# Altium PCB 发送端V02.PcbDoc
Units mm, origin at the board's own origin, x right, y up, seen from the top; angles counter-clockwise.
Board outline 99.5 x 63.5 mm, 2 copper layers (Top Layer, Bottom Layer); 58 components, 29 nets, 249 pads, 0 vias.
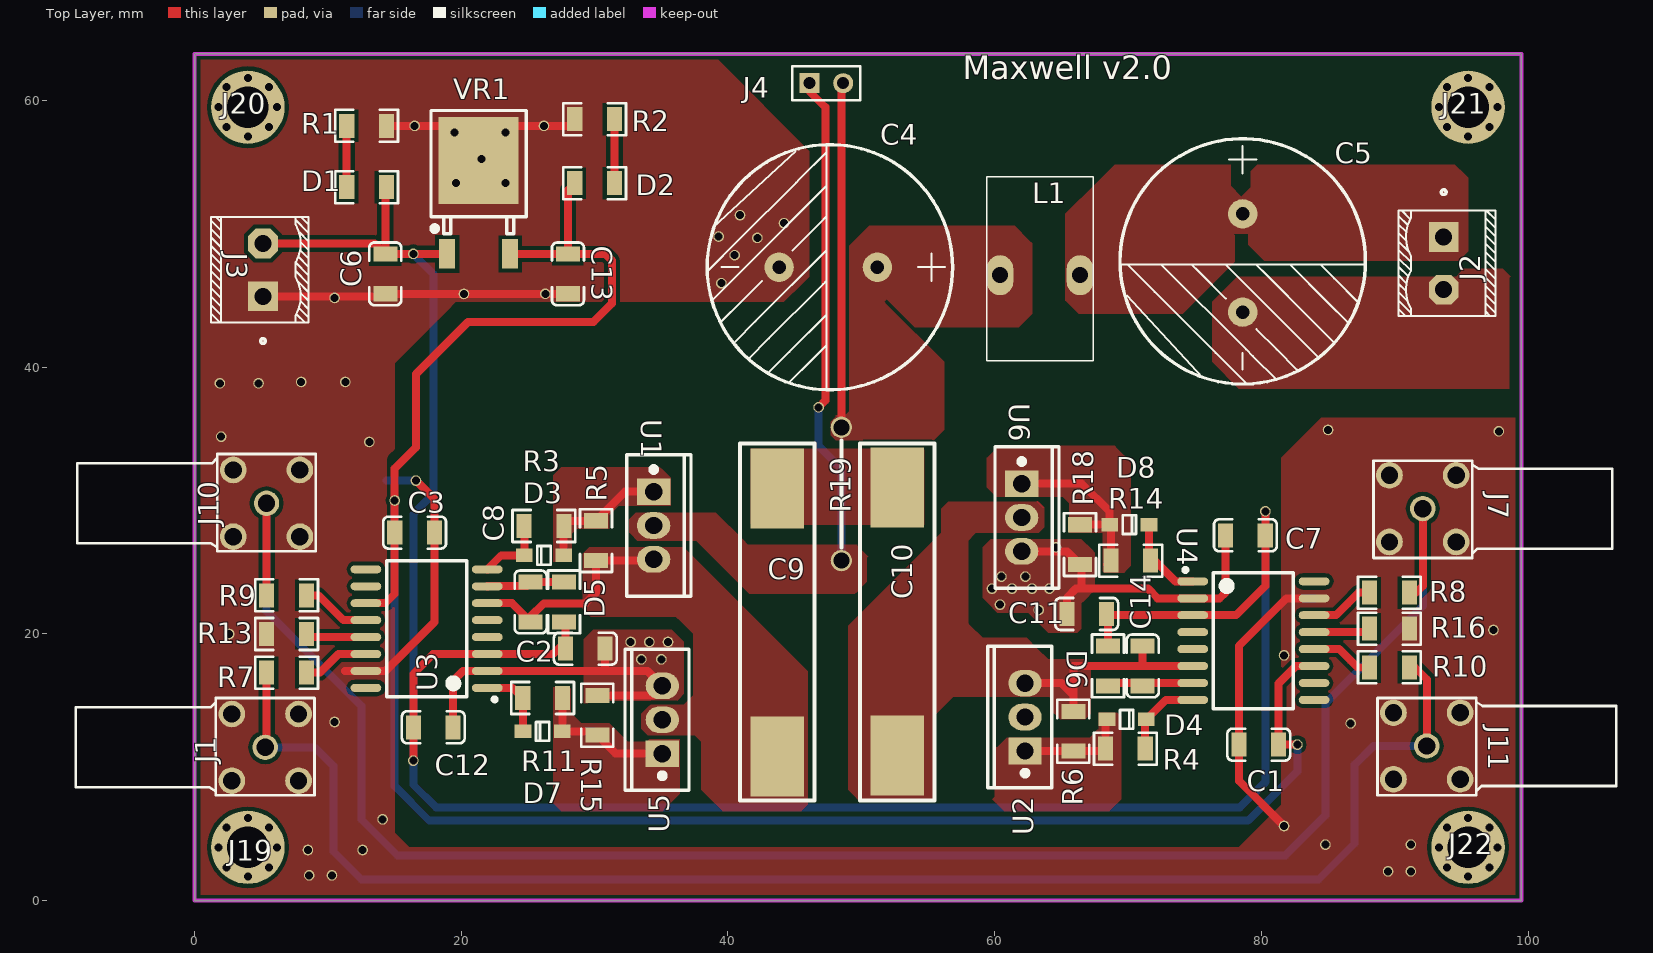
[diagram p0: Top Layer view]
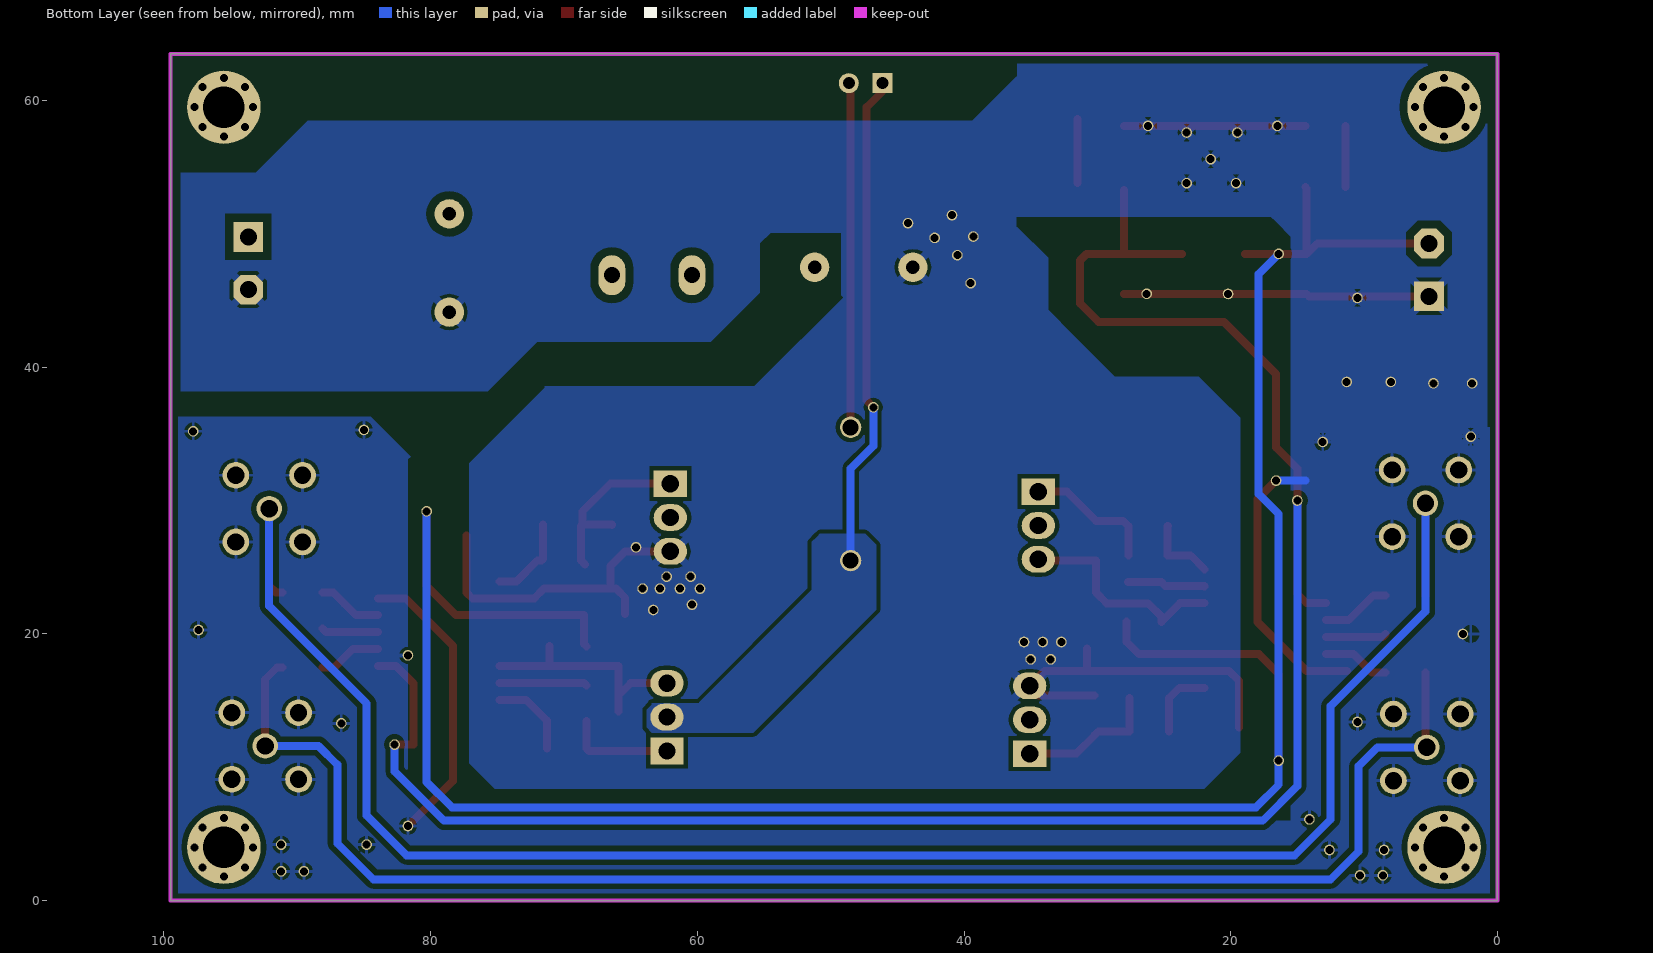
[diagram p1: Bottom Layer view, seen from below]
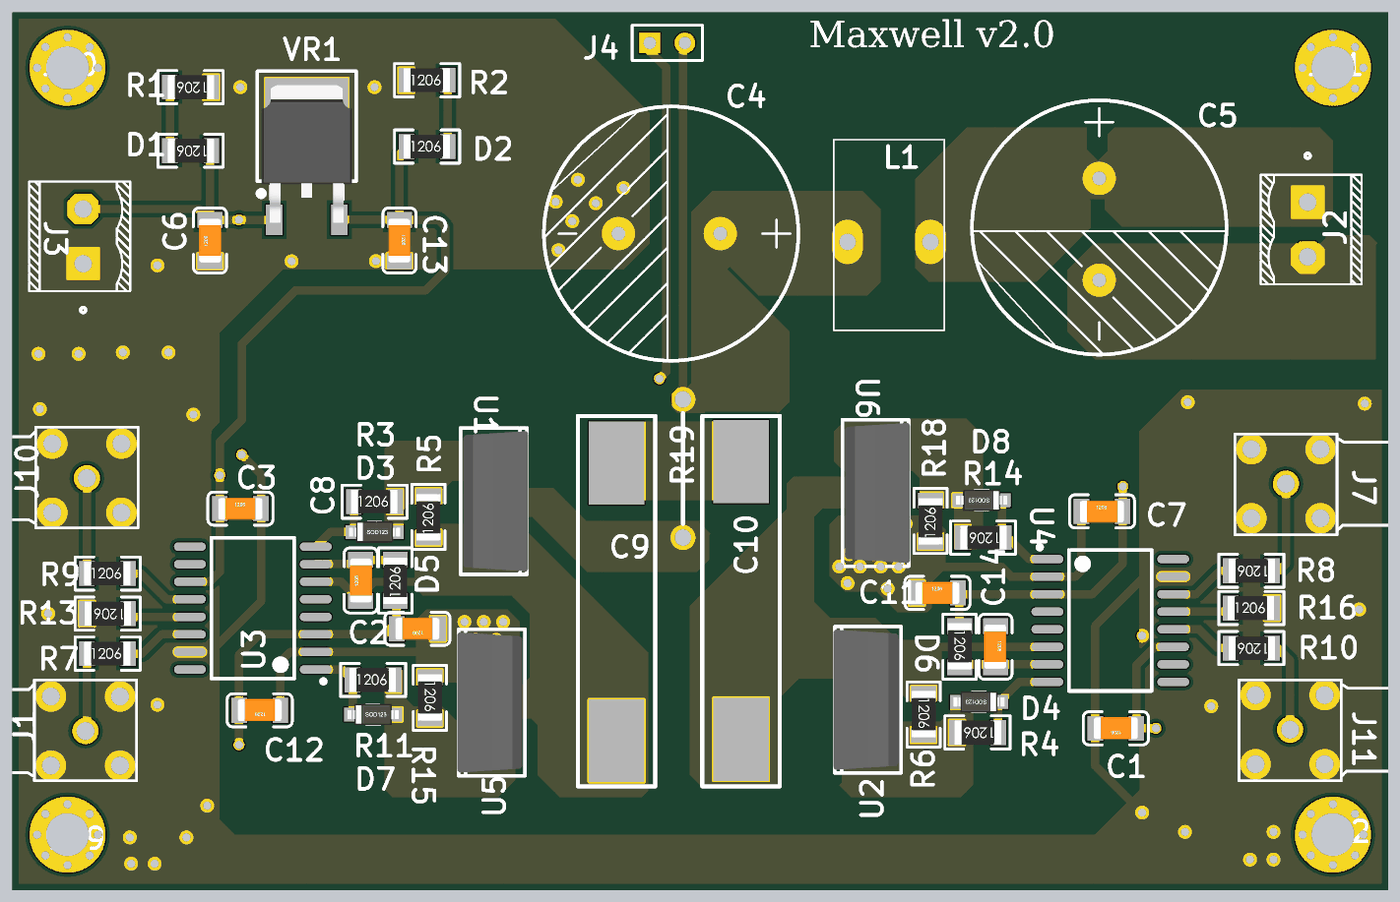
[diagram p2: 3D render of the assembled board from above, using the file's embedded part models]

## Layer stack, top to bottom
Top Solder: solder mask 0.0102, Solder Resist, Dk 3.5
Top Layer: signal copper 0.0356
Dielectric1: dielectric 0.32, FR-4, Dk 4.8
Bottom Layer: signal copper 0.0356
Bottom Solder: solder mask 0.0102, Solder Resist, Dk 3.5

## Board outline
0,0 0,63.5 99.5,63.5 99.5,0

## Design rules (kind name [scope] priority, off if disabled: settings)
Clearance [All] p1: gap=0.3
ComponentClearance [All] p1: gap=0 collisioncheckmode=3 verticalgap=0 showdistances=FALSE
HoleSize [All] p1 off: absolutevalues=TRUE maxlimit=2.54 minlimit=0.3 maxpercent=80.000 minpercent=20.000
HoleToHoleClearance [All] p1 off: gap=0.254 allowstackedmicrovias=TRUE
LayerPairs [All] p1 off: enforce=TRUE
MinimumSolderMaskSliver [All] p1 off: minsoldermaskwidth=0.254
NetAntennae [All] p1 off: netantennaetolerance=0
PolygonConnect [All] p1: connectstyle=Direct reliefconductorwidth=0.6 reliefentries=4 polygonreliefangle="45 Angle" airgapwidth=0.254
RoutingVias [All] p1: holewidth=0.4 width=0.6 viastyle="Through Hole" minholewidth=0.3 minwidth=0.5 maxholewidth=20 maxwidth=30
SilkToSilkClearance [All] p1 off: silktosilkclearance=0.254
SilkToSolderMaskClearance SilkscreenOverComponentPads [IsPad] p1 off: minsilkscreentomaskgap=0.254 clearancetoexposedcopper=TRUE
SolderMaskExpansion [All] p1: expansion=0.102
Width [All] p1: maxlimit=20 minlimit=0.6 preferedwidth=1
22 further rules are at their usual default settings.

## Components (designator, comment, footprint, x,y, rotation, side; value= is the part's Value field where it differs from the comment)
C1 "10UF" 1206_C 79.8,11.7 r180 top
C2 "10UF" 1206_C 29.3,18.9 r180 top
C3 "10UF" 1206_C 16.5,27.6 r0 top
C4 "47uF/160V" C3618 51.2,47.5 r180 top
C5 "47uF/160V" C3618 78.6,51.5 r270 top
C6 "10UF" 1206_C 14.3,47 r90 top
C7 "10UF" 1206_C 78.8,27.4 r0 top
C8 "2.2nF" 1206_C 25.2,22.4 r90 top
C9 "0.1uF/160V" DSMC82 43.6,9.7 r90 top
C10 "0.1uF/160V" DSMC82 52.8,32.1 r270 top
C11 "2.2nF" 1206_C 66.9,21.5 r0 top
C12 "2.2nF" 1206_C 17.9,13 r180 top
C13 "10UF" 1206_C 28,47 r270 top
C14 "2.2nF" 1206_C 71.1,17.6 r270 top
D1 "LED3" 1206_R 12.9,53.5 r180 top
D2 "LED3" 1206_R 30,53.8 r0 top
D3 "1N4148WS" SOD-123 26.2,25.9 r0 top
D4 "1N4148WS" SOD-123 69.9,13.6 r180 top
D5 "B2100" 1206_R 27.7,22.4 r90 top
D6 "1N4148WS" 1206_R 68.5,17.6 r270 top
D7 "1N4148WS" SOD-123 26.1,12.7 r0 top
D8 "1N4148WS" SOD-123 70.1,28.2 r180 top
J1 "CON-2" GPSPIN 7.8,9 r180 top
J2 "CON-2" F396P2-1 93.9,48 r90 top
J3 "CON-2" F396P2-1 4.9,47.1 r270 top
J4 "CON-2" HDR1X2 46.1,61.3 r0 top
J7 "CON-2" GPSPIN 89.6,31.9 r0 top
J10 "CON-2" GPSPIN 7.9,27.3 r180 top
J11 "CON-2" GPSPIN 89.9,14.1 r0 top
J19 "Socket" M3 4,4 r0 top
J20 "Socket" M3 4,59.5 r0 top
J21 "Socket" M3 95.5,59.5 r0 top
J22 "Socket" M3 95.5,4 r0 top
L1 "330mH" H3.3 66.4,46.9 r180 top
R1 "5K" 1206_R 12.9,58.1 r180 top
R2 "1K" 1206_R 30,58.6 r0 top
R3 "22R" 1206_R 26.2,28.1 r0 top
R4 "22R" 1206_R 69.8,11.4 r180 top
R5 "10K" 1206_R 30.1,27 r90 top
R6 "10K" 1206_R 65.9,12.7 r270 top
R7 "100R" 1206_R 6.9,17.1 r0 top
R8 "100R" 1206_R 89.6,23.1 r180 top
R9 "100R" 1206_R 6.9,22.9 r0 top
R10 "100R" 1206_R 89.6,17.5 r180 top
R11 "22R" 1206_R 26.1,15.2 r0 top
R13 "1K" 1206_R 6.9,20 r180 top
R14 "22R" 1206_R 70.2,25.5 r180 top
R15 "10K" 1206_R 30.2,13.9 r270 top
R16 "1K" 1206_R 89.6,20.4 r0 top
R18 "10K" 1206_R 66.4,26.7 r90 top
R19 "1R" R10MR10MM1D5 48.5,25.5 r90 top
U1 "IRF530NS" TO-220 34.5,30.6 r270 top
U2 "NMOS" TO-220 62.2,11.3 r90 top
U3 "IR2110" SOIC-16_300mil 17.4,20.4 r90 top
U4 "IR2110" SOIC-16_300mil 79.4,19.5 r270 top
U5 "IRF540" TO-220 35,11.1 r90 top
U6 "NMOS" TO-220 62.1,31.2 r270 top
VR1 "L78M05ABDT-TR" TO-252-2-180 21.3,48.5 r90 top

## Footprints (in the part's own frame and the unit in brackets; to place one, negate y for a bottom-side part, rotate by r counter-clockwise, add the part's x,y. Pads: shape width x height; smd on the part's side, far side on the other; paste and mask are expansions set on the pad)
1206_C [mm]
  rect 1.13x1.8 smd: 1(-1.49,0) 2(1.49,0)
  silkscreen extent -2.36,-1.2 2.35,1.2, body extent -1.6,-0.81 1.6,0.79, height 1
1206_R [mm]
  rect 1.13x1.8 smd: 1(-1.49,0) 2(1.49,0)
  silkscreen extent -2.36,-1.2 2.35,1.2, body extent -1.7,-0.86 1.65,0.87, height 0.85
C3618 [mm]
  round 2.2 hole 1: 1(0,0) 2(7.366,0)
  silkscreen extent -5.64,-9.2 12.76,9.2
DSMC82 [mm]
  rect 6x4 smd: 1(1.1,-0.1) 2(21.2,-0.1)
  silkscreen extent -2.2,-2.9 24.6,2.7
F396P2-1 [mil]
  rect 88x88 hole 50: 1(70,9)
  oct 88x88 hole 50: 2(-85.91,9)
  silkscreen extent -164,-145 209,143, body extent -167,-148 151,146, height 559
GPSPIN [mm]
  round 1.9 hole 1.3: 1(2.5,-2.5)
  round 2 hole 1.3: 2(0,0) 2(0,-5) 2(5,0) 2(5,-5)
  silkscreen extent -1.2,-6.2 16.7,1.1
H3.3 [mm]
  oval 2x3 hole 1.2: 1(0,0) 2(6,0)
  silkscreen extent -1,-7.4 7,6.4
HDR1X2 [mm]
  rect 1.5x1.5 hole 0.9: 1(0,0)
  round 1.5 hole 0.9: 2(2.54,0)
  silkscreen extent -1.27,-1.27 3.81,1.27
M3 [mm]
  round 0.6 hole 0.6: 1(-2.2,0) 1(-1.6,-1.5) 1(-1.6,1.5) 1(0,-2.2) 1(0,2.2) 1(1.6,-1.5) 1(1.6,1.5) 1(2.2,0)
  round 5.5 hole 3.1: 1(0,0)
R10MR10MM1D5 [mm]
  round 1.6 hole 1.2: 1(0,0) 2(10,0)
  silkscreen extent 1,0 9,0
SOD-123 [mm]
  rect 1.25x1 smd: 1(1.475,0) 2(-1.475,0)
  silkscreen extent -0.5,-0.7 0.5,0.7, body extent -1.85,-0.77 1.85,0.78, height 1.35
SOIC-16_300mil [mm]
  oval 0.6x2.3 smd: 1(-4.445,-4.55) 2(-3.175,-4.55) 3(-1.905,-4.55) 4(-0.635,-4.55) 5(0.635,-4.55) 6(1.905,-4.55) 7(3.175,-4.55) 8(4.445,-4.55) 9(4.445,4.55) 10(3.175,4.55) 11(1.905,4.55) 12(0.635,4.55) 13(-0.635,4.55) 14(-1.905,4.55) 15(-3.175,4.55) 16(-4.445,4.55)
  silkscreen extent -5.45,-5.25 5.1,3
TO-220 [mm]
  oval 2x2.5 hole 1.3: D(2.468,-0.077) S(5.008,-0.077)
  rect 2x2.5 hole 1.3: G(-0.072,-0.077)
  silkscreen extent -2.83,-2.08 7.77,2.72, body extent -2.6,-1.88 7.54,2.82, height 19.37
TO-252-2-180 [mm] "180度编带包装"
  rect 2.2x1.2 smd: 1(0,2.361) 3(0.004,-2.361)
  rect 6.5x6 smd: 2(7,0)
  silkscreen extent 1.5,-3.57 10.75,3.57, body extent -0.2,-3.27 9.74,3.27, height 2.44

## Part data
C1 C2 C3 C4 C5 C6 C7 C8 C9 C10 C11 C12 C13 C14: library part CAP
D1 D2: "Typical BLUE SiC LED"
D3 D4 D5 D6 D7 D8: library part 1N4148, "1N4148WS IN4148 0805 SOD323 丝印T4 贴片开关二极管"
L1: library part INL, "CD75--2.2mH 222M 贴片功率电感绕线功率电感 7*7.8*5mm"
R1 R2 R3 R4 R5 R6 R7 R8 R9 R10 R11 R13 R14 R15 R16 R18 R19: library part RES
U1 U5: library part NMOS
VR1: library part "TO-252-2 L78M05ABDT-TR", "低压差线性稳压(LDO)"

## Free pads (board coordinates)
  round 0.8 hole 0.6: 2(80.3,29.2) 3(16.4,10.5) 4(15.01,30.01) 6(82.7,11.7) 7(81.7,18.4) 8(16.6,31.5) 13(8.6,1.9) 14(8.5,3.8) 15(10.3,1.9) 16(91.2,2.2) 17(91.2,4.2) 18(89.5,2.2) 19(97.8,35.2) 20(85,35.3) 21(13.1,34.4) 22(2,34.8) 23(2.6,20) 24(97.4,20.3) 25(14.1,6.1) 26(81.7,5.6) 27(84.8,4.2) 28(10.5,13.4) 29(86.7,13.3) 30(12.6,3.8) 31(46.8,37) 32(20.2,45.5) 33(26.3,45.51) 34(10.5,45.2) 35(19.5,57.6) 36(23.3,57.6) 37(19.6,53.8) 38(23.3,53.8) 39(21.5,55.6) 40(16.5,58.1) 41(26.2,58.1) 42(16.4,48.5) 43(35.5,19.4) 44(34.1,19.4) 45(33.5,18.1) 46(32.7,19.4) 47(35,18.1) 48(59.8,23.4) 49(61.3,23.4) 50(62.8,23.4) 51(64.1,23.4) 52(63.3,21.8) 53(60.4,22.2) 54(62.3,24.3) 55(60.5,24.3) 56(64.6,26.5) 57(44.2,50.8) 58(42.2,49.7) 59(40.5,48.4) 60(39.5,46.3) 61(40.9,51.4) 62(39.3,49.8) 63(1.9,38.8) 64(4.8,38.8) 65(8,38.9) 66(11.3,38.9)

## Nets (pads, with @x,y where several pads share a name; then routed paths per layer and width w, separated by ;. In a path a pad name is that pad's centre, name@x,y a point inside that pad or via, vN(x,y) a via of type N, cw(c..) or ccw(c..) an arc to the next point about the centre after c; other vN are vias at no path point)
5V: C1.1 C3.1 C13.1 D2.1 pad.4 pad.6 U3.11 U4.11 VR1.3 | length 155.2
  Top Layer w0.6: U3.11 14.305,22.305 15.01,23.01 C3.1 pad.4 15.01,32.41 16.6,34 16.6,39.5 20.5,43.4 29.9,43.4 31.3,44.8 31.3,48 30.81,48.49 C13.1 D2.1@28,53.29 ; VR1.3 C13.1@27.986,48.504 ; pad.6 C1.1 81.29,16.29 82.595,17.595 U4.11
  Bottom Layer w0.6: pad.4 15.01,8.59 17.6,6 79,6 82.7,9.7 pad.6
12V: C2.2 C6.2 C7.2 C11.2 C12.2 D1.1 D5.1 D6.1 J3.2 pad.2 pad.3 pad.42 U3.3 U4.3 VR1.1 | length 187.1
  Top Layer w0.6: J3.2 13.508,49.282 C6.2 ; D1.1 14.3,53.41 C6.2 ; pad.3 16.41,10.51 C12.2 16.41,17.01 17.895,18.495 U3.3 26.895,18.495 27.8,19.4 D5.1@27.8,20.925 ; VR1.1@18.929,48.49 C6.2 ; D6.1@68.3,19.075 68.485,19.26 68.485,21.405 U4.3 78.105,21.405 80.29,23.59 C7.2 80.3,27.41 pad.2
  Bottom Layer w0.6: pad.42 17.9,47 17.9,30.5 16.4,29 pad.3 16.4,8.7 18.1,7 78.4,7 80.3,8.9 pad.2
48V: C5.1 J2.1 L1.1
GND2: C1.2 C2.1 C3.2 C4.2 C5.2 C6.1 C7.1 C11.1 C12.1 C13.2 J1.2 J2.2 J3.1 J7.2 J10.2 J11.2 pad.7 pad.8 pad.13 pad.14 pad.15 pad.16 pad.17 pad.18 pad.19 pad.20 pad.21 pad.22 pad.23 pad.24 pad.25 pad.26 pad.27 pad.28 pad.29 pad.30 pad.32 pad.33 pad.34 pad.35 pad.36 pad.37 pad.38 pad.39 pad.40 pad.41 pad.43 pad.44 pad.45 pad.46 pad.47 pad.48 pad.49 pad.50 pad.51 pad.52 pad.53 pad.54 pad.55 pad.56 pad.57 pad.58 pad.59 pad.60 pad.61 pad.62 pad.63 pad.64 pad.65 pad.66 R1.1 R2.1 R13.2 R15.1 R16.2 R18.1 U3.2 U3.15 U4.2 U4.15 U5.S U6.S VR1.2 | length 130.8
  Top Layer w0.6: J3.1 14.112,45.322 C6.1 C13.2 ; 11.275,17.225 U3.15 14.325,17.225 17.99,20.89 C3.2 17.99,30.11 pad.8 ; R1.1 R2.1@28.01,58.1 ; C12.1 19.39,16.49 20.125,17.225 U3.2 33.96,17.225 U5.S ; R15.1 U5.S@34.359,15.39 ; 30.79,17.235 C2.1 ; U6.S 65.418,26.192 R18.1 66.5,25.11 66.5,23.4 ; C11.1 65.41,22.71 66.1,23.4 66.5,23.4 ; C7.1 77.31,23.11 76.875,22.675 U4.2 72.225,22.675 71.5,23.4 66.5,23.4 ; pad.26 78.31,8.99 C1.2 78.31,19.11 81.875,22.675 U4.15
  Bottom Layer w0.6: 14.4,31.5 pad.8
HIN: J7.1 J10.1 R8.1 R9.1 | length 141.2
  Top Layer w0.6: J10.1 5.41,29.79 R9.1 ; R8.1 91.6,23.1 92.1,23.6 J7.1
  Bottom Layer w0.6: J10.1 5.4,21.7 12.5,14.6 12.5,6.1 15.2,3.4 81.8,3.4 84.8,6.4 84.8,14.8 92.1,22.1 J7.1
LIN: J1.1 J11.1 R7.1 R10.1 | length 114.9
  Top Layer w0.6: J1.1 5.41,11.61 R7.1 ; R10.1 91.5,17.5 92.4,16.6 J11.1
  Bottom Layer w0.6: J1.1 9,11.5 10.4,10.1 10.4,3.7 12.5,1.6 84.3,1.6 87,4.3 87,10.2 88.4,11.6 J11.1
NetC4_1: C4.1 J4.2 L1.2 R19.2 | length 26
  Top Layer w0.6: R19.2 J4.2@48.5,61.46
NetC8_1: C8.1 C9.1 R5.1 U1.S U3.6 U5.D | length 16.6
  Top Layer w0.6: U3.6 23.805,22.305 C8.1 25.2,21.3 26.2,22.3 29.3,22.3 30.1,23.1 R5.1 34.341,25.51 U1.S
NetC8_2: C8.2 D5.2 U3.7 | length 5.9
  Top Layer w0.6: U3.7 21.975,23.6 24.91,23.6 C8.2 D5.2
NetC9_2: C9.2 C10.1
NetC10_2: C10.2 C14.1 R6.1 U2.S U4.6 U6.D | length 17.8
  Top Layer w0.6: U2.S 64.992,16.308 65.9,15.4 ; R6.1 65.9,15.4 ; 71.1,17.595 C14.1 ; U4.6 65.9,17.595 65.9,15.4
NetC14_2: C14.2 D6.2 U4.7 | length 6.6
  Top Layer w0.6: D6.2@68.3,16.125 68.5,16.325 U4.7
NetD1_2: D1.2 R1.2 | length 4.6
  Top Layer w0.6: D1.2 R1.2
NetD2_2: D2.2 R2.2 | length 4.8
  Top Layer w0.6: D2.2 R2.2
NetD3_1: D3.1 R3.2 R5.2 U1.G | length 10
  Top Layer w0.6: D3.1 27.675,28.085 R3.2 28.08,28.49 R5.2 32.282,30.672 U1.G
NetD3_2: D3.2 R3.1 U3.8 | length 5.4
  Top Layer w0.6: U3.8 23.005,25.9 D3.2 24.725,28.085 R3.1
NetD4_1: D4.1 R4.2 R6.2 U2.G | length 8.2
  Top Layer w0.6: U2.G 68.138,11.228 R4.2 D4.1@68.31,13.485
NetD4_2: D4.2 R4.1 U4.8 | length 6.3
  Top Layer w0.6: R4.1 71.29,13.515 D4.2 72.83,15.055 U4.8
NetD7_1: D7.1 R11.2 R15.2 U5.G | length 10.7
  Top Layer w0.6: R11.2 27.59,12.715 D7.1 29.91,12.7 R15.2 31.582,11.028 U5.G
NetD7_2: D7.2 R11.1 U3.1 | length 5.5
  Top Layer w0.6: U3.1 23.855,15.955 R11.1 24.625,15.185 D7.2
NetD8_1: D8.1 R14.2 R18.2 U6.G | length 13.8
  Top Layer w0.6: U6.G 66.528,31.272 68.625,29.175 D8.1 ; R18.2 66.41,28.2 D8.1 ; R14.2@68.42,25.21 R14.2 68.71,28.115 D8.1
NetD8_2: D8.2 R14.1 U4.1 | length 6.6
  Top Layer w0.6: D8.2 71.575,25.615 R14.1 72,25.5 73.555,23.945 U4.1
NetJ4_1: J4.1 pad.31 R19.1 U1.D U2.D | length 37.2
  Top Layer w0.6: J4.1 46.1,60.7 47.3,59.5 47.3,37.5 pad.31
  Bottom Layer w0.6: pad.31 46.8,34.1 48.5,32.4 R19.1
NetR7_2: R7.2 U3.14 | length 5
  Top Layer w0.6: R7.2 9.4,17.1 10.795,18.495 U3.14
NetR8_2: R8.2 U4.14 | length 4.9
  Top Layer w0.6: U4.14 85.605,21.405 86.5,22.3 87.3,23.1 R8.2
NetR9_2: R9.2 U3.12 | length 5.2
  Top Layer w0.6: R9.2 9.3,22.9 11.165,21.035 U3.12
NetR10_2: R10.2 U4.12 | length 4.7
  Top Layer w0.6: U4.12 85.835,18.865 86.7,18 87.2,17.5 R10.2
NetR13_1: R13.1 U3.13 | length 4.6
  Top Layer w0.6: R13.1 8.625,19.765 U3.13
NetR16_1: R16.1 U4.13 | length 4.3
  Top Layer w0.6: U4.13 87.845,20.135 R16.1
pads on no net: J19.1 J20.1 J21.1 J22.1 U3.4 U3.5 U3.9 U3.10 U3.16 U4.4 U4.5 U4.9 U4.10 U4.16

## Polygon pours and split planes (outlines as drawn)
GND2 on Top Layer "Bottom Layer-No Net" (solid, remove dead copper, pour order 93): 95,47.2 94.6,46.8 79,46.8 78.2,46.8 76.4,45 76.3,44.9 76.3,40.8 76.3,40.4 78.2,38.5 78.3,38.4 98.6,38.4 98.6,46.7 98.7,46.8 98.1,47.4 94.9,47.4
GND2 on Top Layer "Bottom Layer-No Net" (solid, remove dead copper, pour order 87): 15.01,33.548 15.01,40.31 18.9,44.2 19.6,44.9 43.5,44.9 44.2,44.9 45.6,46.3 46.1,46.8 46.1,54.9 46.1,56.2 38.7,63.6 38.6,63.5 0,63.5 0,33.6 0.052,33.548 15.01,33.548
48V on Top Layer "Bottom Layer-No Net" (solid, remove dead copper, pour order 85): 65.3,48.6 65.3,51.5 67.6,53.8 69,55.2 77.7,55.2 77.7,53.6 78.5,52.8 79.2,53.5 79.2,53.6 79.2,54.7 79.4,54.9 79.7,55.2 93,55.2 94.5,55.2 95.2,54.5 95.5,54.2 95.5,49.1 95.5,48.7 95.1,48.3 94.8,48 80.8,48 80.2,48 79.3,48.9 79,49.2 79,50 77.9,50 78,49.9 78,48.8 78,47.9 76.7,46.6 74.1,44 69.6,44 66.3,44 65.4,44.9 65.3,45
NetC4_1 on Top Layer "Bottom Layer-No Net" (solid, remove dead copper, pour order 83): 47.7,35.9 48.1,36.3 48.1,36.4 48.8,36.4 48.9,36.5 49.1,36.7 49.1,37.1 49.1,49.1 50.5,50.5 50.6,50.6 61.4,50.6 61.5,50.6 62.6,49.5 62.8,49.3 62.8,44.1 62.8,44 61.8,43 59.1,43 54,43 52,45 51.9,45.1 51.7,44.9 51.9,44.7 56.2,40.4 56.2,36.8 56.2,35.3 55.7,34.8 55.4,34.5 48.1,34.5 47.7,34.9
GND2 on Top Layer "Bottom Layer-No Net" (solid, remove dead copper, pour order 71): 99.5,36.2 84.5,36.2 83,34.7 81.5,33.2 81.5,8.3 81.5,7.2 78.8,4.5 78.3,4 16.3,4 16.1,4 15.1,5 15.01,5.09 15.01,27.6 15.01,33.79 13.4,35.4 -0.1,35.4 -0.1,0.1 0,0 99.5,0 99.5,35.9 99.4,36
NetC9_2 on Top Layer "Bottom Layer-No Net" (solid, remove dead copper, pour order 69): 41.7,33.9 54.6,33.9 54.7,33.8 54.7,28.2 41.6,28.2 41.7,28.3 41.7,33.9
NetD8_1 on Top Layer "Bottom Layer-No Net" (solid, remove dead copper, pour order 65): 65.6,27.6 68.1,27.6 68.1,24.7 68.2,24.6 69.7,24.6 69.9,24.8 70.2,25.1 70.2,32 70.2,32.9 69.2,33.9 69,34.1 60.5,34.1 60.3,34.1 59.5,33.3 59.4,33.2 59.4,31.5 59.4,31 59.9,30.5 60.1,30.3 64.9,30.3 65.1,30.3 65.6,29.8 65.6,27.6
NetD4_1 on Top Layer "Bottom Layer-No Net" (solid, remove dead copper, pour order 63): 60.9,12.2 67.1,12.2 67.2,12.3 67.7,12.8 67.8,12.8 67.8,14.1 69.2,14.1 69.4,13.9 69.5,13.8 69.5,7.7 69.5,7.6 68.6,6.7 61.2,6.7 60.7,6.7 59.8,7.6 60,7.8 60,11.5 60.2,11.5 60.9,12.2
NetD7_1 on Top Layer "Bottom Layer-No Net" (solid, remove dead copper, pour order 61): 33.9,11.9 34.1,12.1 36.4,12.1 36.4,8 35.2,6.8 35.1,6.7 27.7,6.7 27.5,6.7 27,7.2 26.9,7.3 26.9,16 28.1,16 28.2,15.9 28.2,13.9 28.4,13.9 29,13.3 31,13.3 31.1,13.3 31.9,12.5 32.5,11.9 33.9,11.9
NetD3_1 on Top Layer "Bottom Layer-No Net" (solid, remove dead copper, pour order 59): 28.3,25.4 28.3,27.5 28.6,27.8 28.7,27.9 31.1,27.9 31.1,28.9 31.8,29.6 35.7,29.6 35.7,31.7 35.1,32.3 34.9,32.5 27.7,32.5 27.5,32.5 27.1,32.1 26.9,31.9 26.9,25.4 28.3,25.4
NetC10_2 on Top Layer "Bottom Layer-No Net" (solid, remove dead copper, pour order 57): 64,18.1 66.8,18.1 67.2,17.7 67.2,16 67.2,14 66.8,13.6 64.9,13.6 64.6,13.9 64.4,14.1 64.4,14.9 64.4,15 64.1,15.3 63.6,15.3 63.6,17.9 63.8,18.1 64,18.1
GND2 on Top Layer "Bottom Layer-No Net" (solid, remove dead copper, pour order 55): 59.7,27.1 66.5,27.1 67.3,26.3 67.5,26.1 67.5,23.7 67.5,23.3 66.7,22.5 66.5,22.3 66.5,20.5 66.5,20.4 66.2,20.1 64,20.1 62.5,21.6 60.9,21.6 60.2,21.6 59.5,22.3 59.1,22.7 59.1,26.4 59.1,26.5
GND2 on Top Layer "Bottom Layer-No Net" (solid, remove dead copper, pour order 37): 29.2,14.8 29.2,19.6 29.6,20 29.9,20.3 35.2,20.3 35.8,20.3 36.6,19.5 36.7,19.4 36.7,15.9 36.7,15.5 36.3,15.1 36.2,15 29.9,15 29.7,15 29.5,14.8 29.2,14.8
NetC8_1 on Top Layer "Bottom Layer-No Net" (solid, remove dead copper, pour order 35): 29.1,26 29.6,26.5 35.3,26.5 36.7,26.5 41.9,21.3 46,17.2 46,7.4 46,7.2 45.5,6.7 40.8,6.7 39.6,6.7 38.7,7.6 38,8.3 38,11.5 38,11.9 37.5,12.4 34.1,12.4 34,12.4 33.5,12.9 33.5,14 34.1,14.6 34.2,14.7 36.4,14.7 36.7,14.7 37.4,15.4 37.4,17.3 37.4,20 36.5,20.9 36.1,21.3 33,21.3 29.7,21.3 29.1,21.9
NetJ4_1 on Top Layer "Bottom Layer-No Net" (solid, remove dead copper, pour order 43): 33.1,29.1 38.8,29.1 39.1,29.1 41.1,27.1 41.5,26.7 49.7,26.7 49.7,26.6 50.5,25.8 50.4,25.7 50.4,24.3 50.4,23.9 49.6,23.1 49.5,23 42,23 41.6,23 37.7,26.9 37.6,27 33.3,27 33.2,27 32.7,27.5 32.6,27.6 32.6,28.6 33.1,29.1
NetC10_2 on Top Layer "Bottom Layer-No Net" (solid, remove dead copper, pour order 49): 63.6,29.5 63.2,29.9
NetC10_2 on Top Layer "Bottom Layer-No Net" (solid, remove dead copper, pour order 53): 55.5,7.6 55.5,13.9 55.6,14 56.9,15.3 63.5,15.3 63.6,15.3 64,15.7 64,17.8 64,18.1 63.2,18.9 62.4,19.7 59.5,19.7 59.1,19.7 58.1,20.7 58,20.8 58,26.8 58,27 58.5,27.5 58.6,27.6 62.8,27.6 63.3,27.6 63.7,28 63.7,29.4 63.7,29.5 63.3,29.9 56.5,29.9 56.2,29.6 56,29.4 56,27.6 54.7,26.3 49,20.6 49,9.3 49,8.3 49.6,7.7 49.7,7.6 55.5,7.6
GND2 on Bottom Layer "Bottom Layer-No Net" (solid, remove dead copper, pour order 91): 39.4,58.5 36.1,61.8 36,61.8 36,63.4 36.1,63.5 0,63.5 0,34.2 0.266,33.934 15.5,33.934 15.5,49.8 16.6,50.9 17,51.3 38.3,51.3 38.3,57.4 39.4,58.5
GND2 on Bottom Layer "Bottom Layer-No Net" (solid, remove dead copper, pour order 89): 99.5,38.2 75.7,38.2 73,40.9 72,41.9 59.9,41.9 59,41.9 57.1,43.8 55.3,45.6 55.3,48.5 55.3,49.3 54.5,50.1 49.2,50.1 49.2,45.4 47.7,43.9 39,43.9 39,47.3 36.1,50.2 36.1,54.6 36.1,55.2 39.1,58.2 39.4,58.5 68.5,58.5 89.2,58.5 91.2,56.5 93.1,54.6 99.5,54.6 99.5,38.5 99.3,38.3
GND2 on Bottom Layer "Bottom Layer-No Net" (solid, remove dead copper, pour order 81): 35.9,50.5 46.6,50.5 46.7,50.6 48.7,48.6 48.7,48 48.7,45.6 55.736,38.564 71.436,38.564 71.436,38.464 77.1,32.8 77.1,10.9 77.1,10.3 75.2,8.4 74.2,8.4 22.1,8.4 22,8.4 19.3,11.1 19.3,36.2 20.9,37.8 22.4,39.3 27.7,39.3 28.7,39.3 31.8,42.4 33.7,44.3 33.7,48.1 33.7,48.2 36,50.5
GND2 on Bottom Layer "Bottom Layer-No Net" (solid, remove dead copper, pour order 77): 0,35.5 13.6,35.5 14.1,35.5 15.5,34.1 15.5,6 79,6 81.7,8.7 81.7,9.2 81.7,33.1 81.5,33.3 84.5,36.3 84.8,36.3 99.5,36.3 99.5,0 0,0 0,35.5
NetJ4_1 on Bottom Layer "Bottom Layer-No Net" (solid, remove dead copper, pour order 67): 63.8,14.3 63.4,14.7 63.4,14.8 59.9,14.8 59.8,14.9 51.4,23.3 51.4,26.9 51,27.3 50.8,27.5 47.7,27.5 47.4,27.5 46.9,27 46.6,26.7 46.6,22.6 46.6,21.8 55.8,12.6 62.8,12.6 63.4,12.6 63.8,13

## Keep-outs
Keep-Out Layer:
  the board outline again, w0.3

## Silkscreen, mask and mechanical layers (free items; w line width, h text height)
Top Overlay:
  text "Maxwell v2.0" at 57.6,61 h3